# Altium PCB power2pix_pcb.PcbDoc
Units mm, origin at the board's own origin, x right, y up, seen from the top; angles counter-clockwise.
Board outline 100 x 70 mm, 2 copper layers (Top Layer, Bottom Layer); 70 components, 36 nets, 230 pads, 24 vias.
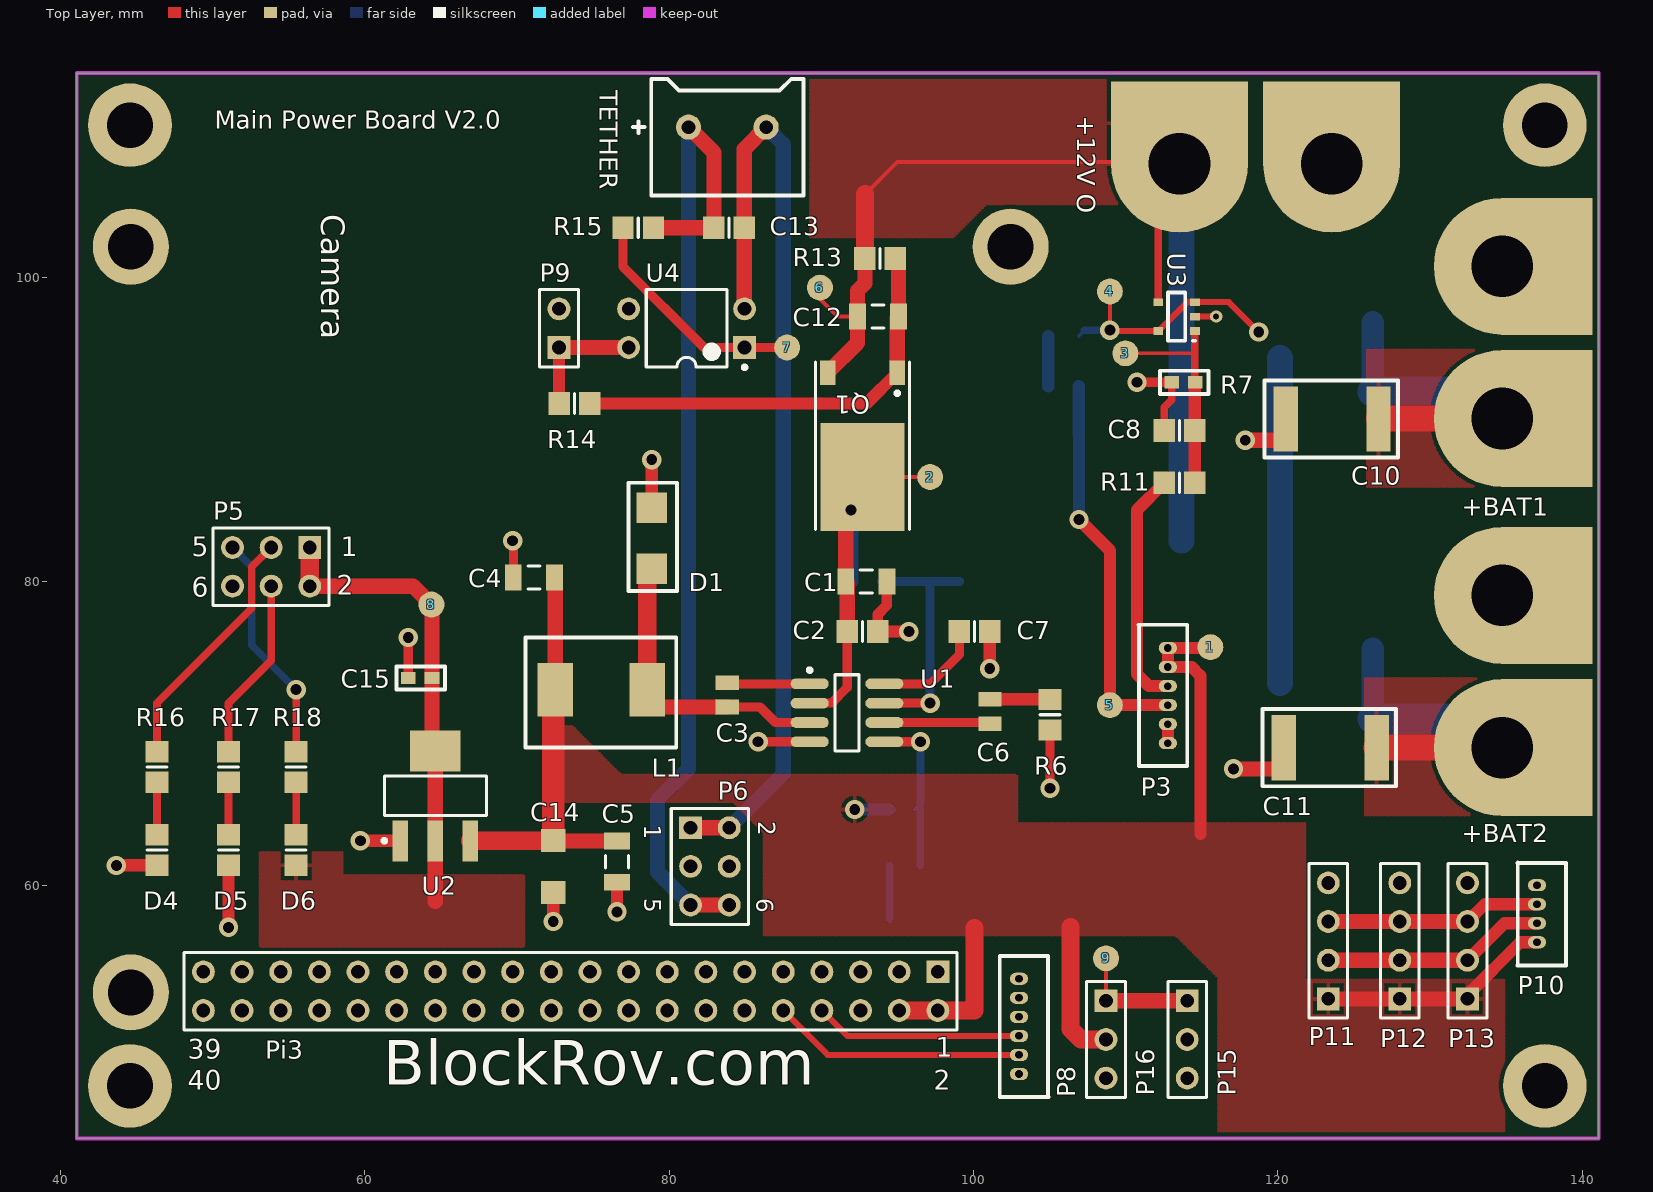
[diagram p0: Top Layer view]
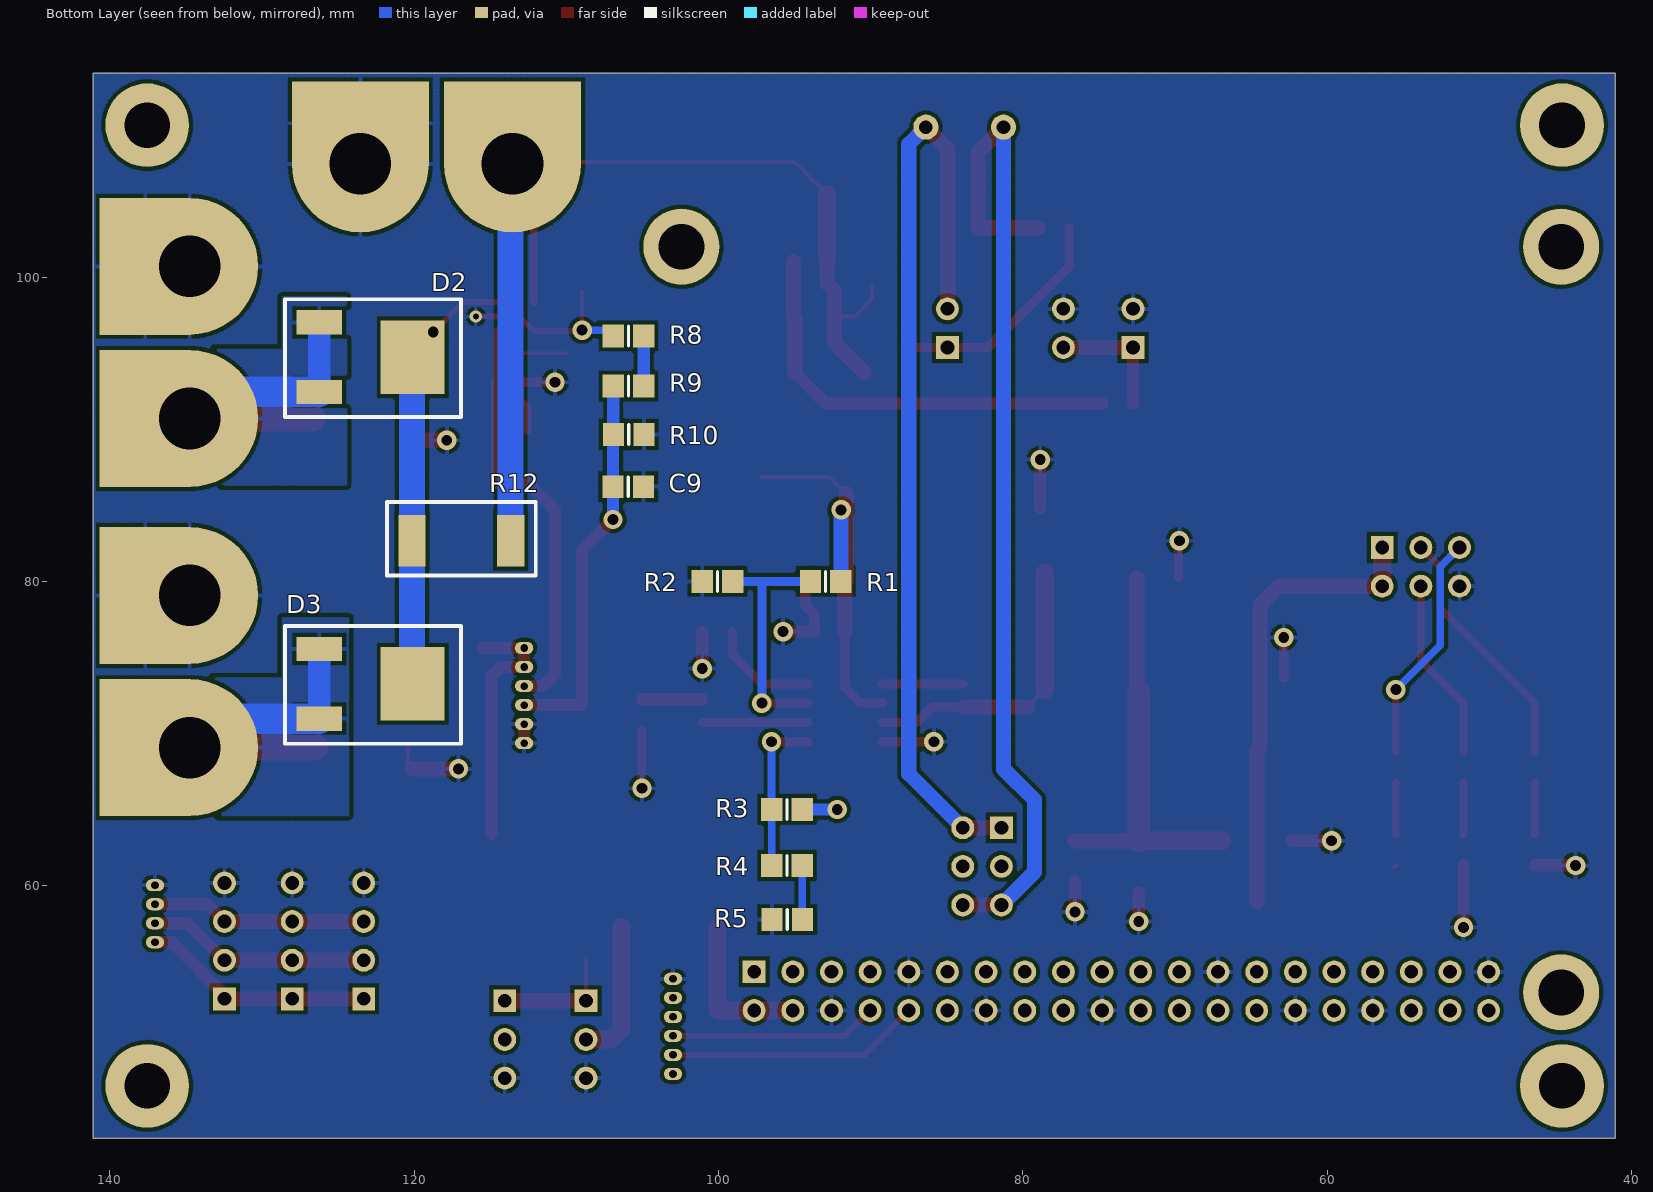
[diagram p1: Bottom Layer view, seen from below]

## Layer stack, top to bottom
Top Solder: solder mask 0.0102, Solder Resist, Dk 3.5
Top Layer: signal copper 0.0356
Dielectric 1: dielectric 0.32, FR-4, Dk 4.8
Bottom Layer: signal copper 0.0356
Bottom Solder: solder mask 0.0102, Solder Resist, Dk 3.5

## Board outline
41.087,43.411 41.087,113.411 141.087,113.411 141.087,43.424 141.074,43.411

## Design rules (kind name [scope] priority, off if disabled: settings)
Clearance [All] p1: gap=0.254
PolygonConnect [All] p1: connectstyle=Relief reliefconductorwidth=0.254 reliefentries=4 polygonreliefangle="90 Angle" airgapwidth=0.254
RoutingVias [All] p1: holewidth=0.711 width=1.27 viastyle="Through Hole" minholewidth=0.711 minwidth=1.27 maxholewidth=0.711 maxwidth=1.27
SolderMaskExpansion [All] p1: expansion=0.102
Width [All] p1: maxlimit=4 minlimit=0.254 preferedwidth=0.254
30 further rules are at their usual default settings.

## Classes and differential pairs
component class power2pix: 1 2 3 4 5 6 7 8 C1 C2 C3 C4 C5 C6 C7 C8 C9 C10 C11 C12 C13 C14 C15 D1 D2 D3 L1 Q1 R1 R2 R3 R4 R5 R6 R7 R8 R9 R10 R11 R12 R13 R14 R15 U1 U2 U3 U4
component class power2pix_connector: 9 "+12V O" +BAT1 +BAT2 D4 D5 D6 P3 P5 P6 P8 P9 P10 P11 P12 P13 P15 P16 Pi3 R16 R17 R18 TETHER

## Components (designator, comment, footprint, x,y, rotation, side; value= is the part's Value field where it differs from the comment)
1 "tp" testpoint 115.57,75.692 r0 top (schematic designator tp1)
2 "tp" testpoint 97.155,86.868 r90 top (schematic designator tp2)
3 "tp" testpoint 109.982,94.996 r90 top (schematic designator tp3)
4 "tp" testpoint 108.966,99.06 r90 top (schematic designator tp4)
5 "tp" testpoint 108.966,71.882 r0 top (schematic designator tp5)
6 "tp" testpoint 89.916,99.314 r0 top (schematic designator tp6)
7 "tp" testpoint 87.757,95.377 r0 top (schematic designator tp7)
8 "tp" testpoint 64.389,78.486 r180 top (schematic designator tp8)
9 "tp" testpoint 108.712,55.245 r0 top (schematic designator tp9)
"+12V O" "Header 2" M4_POWER 113.538,107.442 r0 top locked (schematic designator P14)
+BAT1 "Header 2" M4_POWER 134.747,90.711 r90 top locked (schematic designator P1)
+BAT2 "Header 2" M4_POWER 134.747,69.088 r90 top locked (schematic designator P2)
C1 "Cap" C1206 92.964,80.01 r180 top
C2 "Cap" 6-0805_M 92.71,76.708 r180 top
C3 "Cap" 0603 83.82,71.755 r90 top
C4 "Cap" C1206 71.12,80.264 r0 top
C5 "Cap" C1206 76.581,61.595 r90 top
C6 "Cap" 0603 101.092,72.263 r270 top
C7 "Cap" 6-0805_M 100.076,76.708 r180 top
C8 "Cap" 6-0805_M 113.538,89.916 r0 top
C9 "Cap" 6-0805_M 105.934,86.233 r0 bottom
C10 "Cap Pol2" 7343 126.619,90.678 r180 top
C11 "Cap Pol2" 7343 126.492,69.088 r180 top
C12 "Cap" C1206 93.726,97.409 r0 top
C13 "Cap" 6-0805_M 83.947,103.251 r0 top
C14 "Cap" 1206 72.36,59.522 r90 top
C15 "Cap" my0603 62.865,73.66 r0 top
D1 "1n5824" 1N5824 78.867,84.836 r270 top
D2 "MBRD835L" MBRD835L 120.103,94.742 r0 bottom
D3 "MBRD835L" MBRD835L 120.103,73.279 r0 bottom
D4 "LED0" 6-0805_M 46.355,62.357 r270 top
D5 "LED0" 6-0805_M 51.054,62.357 r270 top
D6 "LED0" 6-0805_M 55.499,62.357 r90 top
L1 "Inductor" 0630 78.567,72.898 r180 top
P3 "Header 6" 1.25_6PIN 112.776,75.632 r270 top
P5 "Header 3X2" HDR2X3 56.397,82.236 r180 top locked
P6 "Header 3X2" HDR2X3 81.416,63.823 r270 top locked
P8 "Header 6" 1.25_6PIN 102.997,47.645 r90 top
P9 "Header 2" HDR1X2 72.771,95.377 r90 top
P10 "Header 4" 1_25_4PIN 137.033,56.301 r90 top
P11 "Header 4" HDR1X4 123.317,52.578 r90 top
P12 "Header 4" HDR1X4 128.016,52.578 r90 top
P13 "Header 4" HDR1X4 132.461,52.578 r90 top
P15 "Header 3" HDR1X3 114.046,52.451 r270 top
P16 "Header 3" HDR1X3 108.712,52.451 r270 top
Pi3 "Header 20X2" HDR2X20 97.663,54.356 r180 top locked (schematic designator P4)
Q1 "IRFR5305" TO-252AA 92.71,90.293 r180 top
R1 "Res2" 6-0805_M 92.964,80.01 r180 bottom
R2 "Res2" 6-0805_M 100.076,80.01 r180 bottom
R3 "Res2" 6-0805_M 95.504,65.024 r0 bottom
R4 "Res2" 6-0805_M 95.504,61.341 r0 bottom
R5 "Res2" 6-0805_M 95.488,57.785 r180 bottom
R6 "Res2" 6-0805_M 105.029,71.247 r90 top
R7 "Res2" my0603 113.03,93.091 r0 top
R8 "Res2" 6-0805_M 105.918,96.139 r0 bottom
R9 "Res2" 6-0805_M 105.918,92.837 r180 bottom
R10 "Res2" 6-0805_M 105.902,89.662 r0 bottom
R11 "Res2" 6-0805_M 113.538,86.487 r180 top
R12 "Res2" 2512 120.145,82.677 r180 bottom
R13 "Res2" 6-0805_M 93.869,101.219 r0 top
R14 "Res2" 6-0805_M 73.787,91.694 r180 top
R15 "Res2" 6-0805_M 77.978,103.251 r0 top
R16 "Res2" 6-0805_M 46.355,67.818 r90 top
R17 "Res2" 6-0805_M 51.054,67.818 r90 top
R18 "Res2" 6-0805_M 55.499,67.818 r270 top
TETHER "Header 2" ConnectorBlue 86.38,109.855 r180 top (schematic designator P7)
U1 "MP1593DN" SO8_M 91.694,71.374 r0 top
U2 "AMS1117-3.3" SOT223_M 64.643,65.913 r90 top
U3 "INA169" SOT23-5 114.554,98.359 r270 top
U4 "PC817" DIP-4 81.153,96.647 r180 top

## Footprints (in the part's own frame and the unit in brackets; to place one, negate y for a bottom-side part, rotate by r counter-clockwise, add the part's x,y. Pads: shape width x height; smd on the part's side, far side on the other; paste and mask are expansions set on the pad)
1.25_6PIN [mm]
  oval 0.8x1.2 hole 0.5: 1(0,0) 2(1.25,0) 3(2.5,0) 4(3.75,0) 5(5,0) 6(6.25,0)
  silkscreen extent -1.52,-1.93 7.75,1.27
1_25_4PIN [mm]
  oval 0.8x1.2 hole 0.5: 1(0,0) 2(1.25,0) 3(2.5,0) 4(3.75,0)
  silkscreen extent -1.52,-1.91 5.23,1.3
1N5824 [mm]
  rect 2x2 smd: 1(0,0) 2(4,0)
  silkscreen extent -1.65,-1.52 5.46,1.65
6-0805_M [mm] "Chip Resistor, Body 2.0x1.2mm, IPC Low Density"
  rect 1.4x1.5 smd: 1(-1,0) 2(1,0)
  silkscreen extent 0,-0.65 0,0.65, body extent -1.07,-0.7 1.07,0.7, height 0.7
0603 [mm]
  rect 0.965x1.524 smd: 1(0,0) 2(1.6,0)
0630 [mm]
  rect 2.35x3.5 smd: 1(0,0) 2(6.05,0)
  silkscreen extent -1.91,-3.43 8,3.81
1206 [mm]
  rect 1.52x1.6 smd: 1(0.05,-0.03) 2(3.47,-0.03)
2512 [mm]
  rect 1.8x3.4 smd: 1(0,0) 2(6.48,0)
  silkscreen extent -1.65,-2.29 8.13,2.54
7343 [mm]
  rect 1.6x4.3 smd: 1(0,0) 2(6.096,0)
  silkscreen extent -1.27,-2.54 7.49,2.54
C1206 [mm] "Chip Capacitor, Body 3.2x1.6mm, IPC High Density"
  rect 1.1x1.7 smd: 1(-1.35,0) 2(1.35,0)
  silkscreen extent -0.4,-0.75 0.4,0.75, body extent -1.7,-0.9 1.7,0.9, height 1.3
ConnectorBlue [mm]
  round 1.65 hole 0.9: 1(0,0) 2(5.1,0)
  silkscreen extent -2.45,-3.18 8.76,4.48
DIP-4 [mm] "DIP; 4 Leads; Row Spacing 7.62 mm; Pitch 2.54 mm"
  rect 1.5x1.5 hole 0.9: 1(-3.81,1.27)
  round 1.5 hole 0.9: 2(-3.81,-1.27) 3(3.81,-1.27) 4(3.81,1.27)
  silkscreen extent -3.94,-2.55 2.65,2.69, body extent -3.15,-2.5 3.15,2.5, height 5.6
HDR1X2 [mm] "Connector; Header; 2 Position"
  rect 1.5x1.5 hole 0.9: 1(0,0)
  round 1.5 hole 0.9: 2(2.54,0)
  silkscreen extent -1.27,-1.27 3.81,1.27
HDR1X3 [mm] "Connector; Header; 3 Position"
  rect 1.5x1.5 hole 0.9: 1(0,0)
  round 1.5 hole 0.9: 2(2.54,0) 3(5.08,0)
  silkscreen extent -1.27,-1.27 6.35,1.27
HDR1X4 [mm] "Connector; Header; 4 Position"
  rect 1.5x1.5 hole 0.9: 1(0,0)
  round 1.5 hole 0.9: 2(2.54,0) 3(5.08,0) 4(7.62,0)
  silkscreen extent -1.27,-1.27 8.89,1.27
HDR2X3 [mm] "Connector; Header; 3x2 Position"
  rect 1.5x1.5 hole 0.9: 1(0,0)
  round 1.5 hole 0.9: 2(0,2.54) 3(2.54,0) 4(2.54,2.54) 5(5.08,0) 6(5.08,2.54)
  silkscreen extent -1.27,-1.27 6.35,3.81
HDR2X20 [mm] "Connector; Header; 20x2 Position"
  rect 1.5x1.5 hole 0.9: 1(0,0)
  round 1.5 hole 0.9: 2(0,2.54) 3(2.54,0) 4(2.54,2.54) 5(5.08,0) 6(5.08,2.54) 7(7.62,0) 8(7.62,2.54) 9(10.16,0) 10(10.16,2.54) 11(12.7,0) 12(12.7,2.54) 13(15.24,0) 14(15.24,2.54) 15(17.78,0) 16(17.78,2.54) 17(20.32,0) 18(20.32,2.54) 19(22.86,0) 20(22.86,2.54) 21(25.4,0) 22(25.4,2.54) 23(27.94,0) 24(27.94,2.54) 25(30.48,0) 26(30.48,2.54) 27(33.02,0) 28(33.02,2.54) 29(35.56,0) 30(35.56,2.54) 31(38.1,0) 32(38.1,2.54) 33(40.64,0) 34(40.64,2.54) 35(43.18,0) 36(43.18,2.54) 37(45.72,0) 38(45.72,2.54) 39(48.26,0) 40(48.26,2.54)
  silkscreen extent -1.27,-1.27 49.53,3.81
M4_POWER [mm]
  round 9 hole 4.05: 1(0,0) 2(10,0)
MBRD835L [mm]
  rect 3x1.6 smd: 1(6.135,2.286) 3(6.135,-2.286)
  rect 4.191x4.826 smd: 2(0,0)
  silkscreen extent -3.17,-3.81 8.38,3.94
my0603 [mm]
  rect 0.965x0.8 smd: 1(0,0) 2(1.555,0)
  silkscreen extent -0.76,-0.76 2.41,0.76
SO8_M [mm] "SOIC, 8-Leads, Body 4.9x3.9mm, Pitch 1.27mm, IPC Low Density"
  oval 2.5x0.7 smd: 1(-2.45,1.905) 2(-2.45,0.635) 3(-2.45,-0.635) 4(-2.45,-1.905) 5(2.45,-1.905) 6(2.45,-0.635) 7(2.45,0.635) 8(2.45,1.905)
  silkscreen extent -2.57,-2.5 0.8,2.93, body extent -2,-2.5 2,2.5, height 1.75
SOT23-5 [mm]
  rect 0.5x0.65 smd: 1(1.9,0) 2(0.95,0) 3(0,0) 4(0,-2.413) 5(1.9,-2.413)
  silkscreen extent -0.63,-1.78 2.54,0
SOT223_M [mm] "SOT223, 4-Leads, Body 6.5x3.5mm, Pitch 2.3mm, Lead Span 7mm, IPC Low Density"
  rect 2.7x1 smd: 1(-2.95,2.3) 2(-2.95,0) 3(-2.95,-2.3)
  rect 2.7x3.3 smd: 4(2.95,0)
  silkscreen extent -3.07,-3.35 1.3,3.47, body extent -1.85,-3.35 1.85,3.35, height 1.7
testpoint [mm]
  round 1.7 smd: 1(0,0)
TO-252AA [mm] "D-PAK/TO-252-AA; 3 Leads (1 Cropped); Body 10.4 (inc. leads) x 6.7 mm (LxW max)"
  rect 1x1.6 smd: 1(-2.285,-3.425) 3(2.285,-3.425)
  rect 5.5x7.1 smd: 4(0,3.425)
  silkscreen extent -3.09,-4.13 3.09,6.88

## Part data
"+12V O" +BAT1 +BAT2 P9 TETHER: "Header, 2-Pin"
C1 C2 C3 C4 C5 C6 C7 C8 C9 C12 C13 C14 C15: "Capacitor"
C10 C11: "Polarized Capacitor (Axial)"
D1: library part Diode, "Default Diode"
D2 D3: library part "Diode 11DQ03", "Schottky Rectifier"
D4 D5 D6: "Typical INFRARED GaAs LED"
P3 P8: "Header, 6-Pin"
P5 P6: "Header, 3-Pin, Dual row"
P10 P11 P12 P13: "Header, 4-Pin"
P15 P16: "Header, 3-Pin"
Pi3: "Header, 20-Pin, Dual row"
Q1: library part PMOS-2, "P-Channel Power MOSFET"
R1 R2 R3 R4 R5 R6 R7 R8 R9 R10 R11 R12 R13 R14 R15 R16 R17 R18: "Resistor"
U4: library part Optoisolator1, "4-Pin Phototransistor Optocoupler"

## Free pads (board coordinates)
  round 5.5 hole 3: 0(44.577,109.982) 1(44.577,46.863) 2(137.541,109.982) 3(137.541,46.863)
  round 5 hole 3: 4(44.638,102) 5(44.638,53) 6(102.438,102)
  rect 6x9 smd: 7(137.668,100.711) 8(137.668,90.711) 9(137.668,79.088) 10(137.668,69.088)
  rect 9x5.5 smd: 11(123.538,110.109) 12(113.538,110.109)
  rect 6x9 smd far side: 13(137.668,100.711) 14(137.668,90.711) 15(137.668,79.088) 16(137.668,69.088)
  rect 9x5.5 smd far side: 17(123.539,110.109) 18(113.538,110.109)

## Via types
v1: diameter 1.27, hole 0.711, Top Layer to Bottom Layer, 23 vias
v2: diameter 0.8, hole 0.4, Top Layer to Bottom Layer, 1 vias

## Nets (pads, with @x,y where several pads share a name; then routed paths per layer and width w, separated by ;. In a path a pad name is that pad's centre, name@x,y a point inside that pad or via, vN(x,y) a via of type N, cw(c..) or ccw(c..) an arc to the next point about the centre after c; other vN are vias at no path point)
GND: "+12V O.2" +BAT1.2 +BAT2.2 C1.1 C2.1 C4.1 C5.1 C7.1 C8.1 C9.1 C10.2 C11.2 C14.1 C15.1 D1.1 D4.2 D5.2 P3.5 P3.6 P5.6 P8.6 P9.2 P10.4 P11.4 P12.4 P13.4 P15.3 P16.3 pad.7 pad.9 pad.11 pad.13 pad.15 pad.17 Pi3.6 Pi3.9 Pi3.14 Pi3.20 Pi3.25 Pi3.30 Pi3.34 Pi3.39 R2.1 R5.1 R6.1 R7.1 R10.1 U1.4 U2.1 U3.2 U4.3 | length 54.1
  Top Layer w0.254: v1(43.688,61.341) v1@43.704,61.357 ; v1(69.723,82.677) v1@69.77,82.63 ; v1@100.584,74.168 100.695,74.279 v1(101.076,74.279) ; C10.2@120.015,89.281 120.523,89.789 C10.2 ; C11.2@120.142,67.691 120.396,67.945 C11.2 ; P10.4@136.886,60.198 P10.4
  Top Layer w0.4: U3.2 v2(115.951,97.409)
  Top Layer w0.5: C8.1 112.538,91.456 113.03,91.948 R7.1
  Top Layer w0.6: C15.1 v1(62.865,76.327) ; C4.1 v1@69.77,82.63 ; v1(85.852,69.469) U1.4 ; v1(105.029,66.421) R6.1 ; v1(110.744,93.091) R7.1
  Top Layer w0.7: C2.1 93.71,77.835 94.314,78.439 C1.1
  Top Layer w0.8: v1@43.704,61.357 D4.2 ; v1(51.054,57.277) D5.2 ; v1(59.719,62.963) U2.1 ; v1(72.39,57.658) C14.1 ; v1(76.581,58.293) C5.1 ; D1.1 v1(78.867,88.011) ; C2.1 v1(95.758,76.708) ; v1(101.076,74.279) C7.1 ; P3.6 P3.5
  Top Layer w1: v1(117.094,67.691) C11.2@120.142,67.691 ; v1(117.856,89.281) C10.2@120.015,89.281
NetC1_2: 2.1 C1.2 C2.2 Q1.4 R1.2 U1.2 | length 26.4
  Top Layer w0.254: C1.2 C1.2@91.71,79.914 ; Q1.4@91.614,85.772 Q1.4 2.1
  Top Layer w0.6: U1.2 90.678,72.009 91.71,73.041 C2.2
  Top Layer w1: C1.2 Q1.4@91.614,85.772 ; C2.2 C1.2@91.71,79.914
  Bottom Layer w0.254: v1(91.948,84.709) v1@91.964,84.693
  Bottom Layer w1: R1.2 v1@91.964,84.693
NetC3_1: C3.1 D1.2 L1.1 U1.3 | length 19.6
  Top Layer w0.254: L1.1 L1.1@79.71,71.755 ; D1.2@78.567,80.536 D1.2
  Top Layer w0.6: C3.1 85.979,71.755 86.995,70.739 U1.3
  Top Layer w1: L1.1@79.71,71.755 C3.1
  Top Layer w1.2: L1.1 D1.2@78.567,80.536
NetC3_2: C3.2 U1.1 | length 5.5
  Top Layer w0.254: C3.2 C3.2@83.896,73.279
  Top Layer w0.6: C3.2@83.896,73.279 U1.1
NetC4_2: 1.1 C4.2 C5.2 C14.2 L1.2 P3.1 P3.2 P10.1 P11.1 P12.1 P13.1 P16.2 Pi3.2 Pi3.4 R3.1 U2.3 | length 81.2
  Top Layer w0.254: C14.2@72.361,62.963 C14.2 C14.2@72.437,62.945 ; L1.2@72.39,72.771 L1.2 ; C4.2 C4.2@72.517,80.217 ; 1.1@115.51,75.632 1.1 ; P13.1 P13.1@132.461,52.832
  Top Layer w0.8: 114.91,63.424 114.91,73.812 114.34,74.382 P3.2 P3.1 1.1@115.51,75.632 ; P13.1@132.461,52.832 135.93,56.301 P10.1
  Top Layer w1: C14.2@72.437,62.945 C5.2 ; L1.2 C4.2@72.517,80.217 ; P11.1 P12.1 P13.1
  Top Layer w1.2: U2.3 C14.2@72.361,62.963 ; Pi3.4 Pi3.2 100.076,51.816 100.076,57.226 ; 106.375,57.277 106.375,50.597 107.061,49.911 P16.2
  Top Layer w1.5: C14.2 L1.2@72.39,72.771
  Bottom Layer w0.8: v1(92.202,65.024) R3.1
NetC6_1: C6.1 R6.2 | length 3.9
  Top Layer w0.254: R6.2@105.013,72.263 R6.2
  Top Layer w0.8: C6.1 R6.2@105.013,72.263
NetC6_2: C6.2 U1.6 | length 7
  Top Layer w0.254: C6.2@101.016,70.739 C6.2
  Top Layer w0.6: U1.6 C6.2@101.016,70.739
NetC7_2: C7.2 U1.8 | length 7.2
  Top Layer w0.6: U1.8 97.155,73.279 99.076,75.2 C7.2
NetC8_2: 3.1 C8.2 R7.2 R11.1 U3.1 | length 14.6
  Top Layer w0.254: 3.1 114.554,94.996 ; R7.2@114.538,93.106 R7.2@114.554,93.122
  Top Layer w0.5: R7.2@114.554,93.122 114.554,94.996 U3.1
  Top Layer w0.8: R11.1 C8.2 R7.2@114.538,93.106
NetC9_2: 5.1 C9.2 P3.4 R9.1 R10.2 | length 25.6
  Top Layer w0.8: v1(106.934,84.074) 108.966,82.042 5.1 P3.4
  Bottom Layer w0.254: R10.2@106.918,89.678 R10.2 R10.2@106.934,89.63
  Bottom Layer w0.8: R10.2@106.918,89.678 R9.1 ; v1(106.934,84.074) C9.2 R10.2@106.934,89.63
NetC10_1: +BAT1.1 C10.1 D2.1 D2.3 pad.8 pad.14 | length 24.9
  Top Layer w0.254: C10.1 C10.1@126.652,90.711 ; +BAT1.1 pad.8
  Top Layer w1.7: C10.1@126.652,90.711 +BAT1.1
  Bottom Layer w0.254: +BAT1.1@133.002,92.456 +BAT1.1
  Bottom Layer w1.5: D2.1 D2.3
  Bottom Layer w2: D2.1 +BAT1.1@133.002,92.456
NetC11_1: +BAT2.1 C11.1 D3.1 D3.3 pad.10 pad.16 | length 25
  Top Layer w0.254: +BAT2.1 pad.10
  Top Layer w1.7: C11.1 +BAT2.1
  Bottom Layer w0.254: +BAT2.1@132.842,70.993 +BAT2.1
  Bottom Layer w1.5: D3.1 D3.3
  Bottom Layer w2: D3.1 +BAT2.1@132.842,70.993
NetC12_1: 6.1 "+12V O.1" C12.1 pad.12 pad.18 Q1.3 R12.2 R13.1 U3.4 | length 74.2
  Top Layer w0.254: 6.1 89.916,98.552 91.059,97.409 C12.1 ; 92.869,105.442 94.996,107.569 110.998,107.569 112.141,108.712 pad.12
  Top Layer w0.5: U3.4 pad.12@112.141,108.712
  Top Layer w1: Q1.3 92.376,95.669 C12.1 92.376,99.107 92.869,99.6 R13.1
  Top Layer w1.2: R13.1 92.869,105.442
  Bottom Layer w0.254: pad.18@113.538,107.442 113.665,107.315
  Bottom Layer w1.7: R12.2 113.665,107.315
NetC12_2: C12.2 Q1.1 R13.2 R14.1 | length 28.7
  Top Layer w0.254: R13.2 R13.2@95.076,101.012 ; C12.2@94.995,97.328 C12.2
  Top Layer w0.8: R14.1 92.971,91.694 Q1.1
  Top Layer w1: Q1.1 C12.2@94.995,97.328 ; C12.2 R13.2@95.076,101.012
NetC15_2: 8.1 C15.2 D6.1 P5.1 P5.2 U2.2 U2.4 | length 30.8
  Top Layer w0.254: D6.1 D6.1@55.624,61.232 ; 8.1 8.1@64.42,78.455 ; U2.4@64.42,69.086 U2.4
  Top Layer w1: P5.2 63.179,79.696 8.1 ; U2.4@64.42,69.086 C15.2 8.1@64.42,78.455 ; 64.643,58.979 U2.2 U2.4
  Top Layer w1.2: P5.2 P5.1
NetD2_2: 4.1 D2.2 D3.2 R8.2 R12.1 U3.3 U3.5 | length 37.6
  Top Layer w0.254: 4.1 v1(108.966,96.52) v1@109.027,96.459
  Top Layer w0.4: v1@109.027,96.459 U3.5 114.041,98.359 U3.3 116.779,98.359 v1(118.745,96.393)
  Bottom Layer w0.254: R8.2 R8.2@107.299,96.52 ; D3.2 D3.2@120.145,73.321 ; D2.2 D2.2@120.145,94.7
  Bottom Layer w0.5: R8.2@107.299,96.52 v1(108.966,96.52)
  Bottom Layer w1.7: D3.2@120.145,73.321 R12.1 D2.2@120.145,94.7
NetD4_1: D4.1 R16.1 | length 3.5
  Top Layer w0.5: D4.1 R16.1
NetD5_1: D5.1 R17.1 | length 3.5
  Top Layer w0.5: D5.1 R17.1
NetD6_2: D6.2 R18.2 | length 3.5
  Top Layer w0.5: D6.2 R18.2
NetP3_3: P3.3 R11.2 | length 15.7
  Top Layer w0.8: R11.2 110.744,84.693 110.744,73.914 111.526,73.132 P3.3
NetP4_8: P8.3 Pi3.8 | length 13.6
  Top Layer w0.4: Pi3.8 91.714,50.145 P8.3
NetP4_10: P8.2 Pi3.10 | length 16.7
  Top Layer w0.4: Pi3.10 90.424,48.895 P8.2
NetP5_5: P5.5 R18.1 | length 15.2
  Top Layer w0.5: R18.1 v1(55.499,72.898)
  Bottom Layer w0.5: P5.5 52.578,80.975 52.578,75.819 v1(55.499,72.898)
NetP9_1: P9.1 R14.2 U4.4 | length 8.3
  Top Layer w0.254: R14.2@72.771,91.71 R14.2
  Top Layer w0.8: R14.2@72.771,91.71 P9.1
  Top Layer w1: P9.1 U4.4
NetP10_2: P10.2 P11.2 P12.2 P13.2 | length 14.7
  Top Layer w0.8: P13.2 134.894,57.551 P10.2
  Top Layer w1: P11.2 P12.2 P13.2
NetP10_3: P10.3 P11.3 P12.3 P13.3 | length 14.2
  Top Layer w0.8: P13.3 133.604,58.801 P10.3
  Top Layer w1: P11.3 P12.3 P13.3
NetP15_1: 9.1 P15.1 P16.1 | length 8.1
  Top Layer w0.254: P16.1 9.1
  Top Layer w1: P16.1 P15.1
NetR1_1: R1.1 R2.2 U1.7 | length 16.1
  Top Layer w0.6: U1.7 v1(97.155,72.009)
  Bottom Layer w0.6: R1.1 97.155,80.01 ; v1(97.155,72.009) 97.155,80.01 ; R2.2 97.155,80.01
NetR3_2: R3.2 R4.2 U1.5 | length 10.7
  Top Layer w0.254: U1.5@94.123,69.448 U1.5
  Top Layer w0.6: U1.5 v1(96.52,69.469)
  Bottom Layer w0.254: R3.2@96.123,65.024 R3.2@96.52,65.421
  Bottom Layer w0.5: R4.2 R3.2 ; R3.2@96.52,65.421 v1(96.52,69.469)
NetR4_1: R4.1 R5.2 | length 3.6
  Bottom Layer w0.254: R5.2 R5.2@94.504,57.801
  Bottom Layer w0.5: R5.2@94.504,57.801 R4.1
NetR8_1: R8.1 R9.2 | length 3.3
  Bottom Layer w0.8: R9.2 R8.1
NetR15_1: 7.1 R15.1 U4.1 | length 15.5
  Top Layer w0.6: R15.1 76.978,100.695 82.296,95.377 U4.1 7.1
PLC: P5.3 R16.2 | length 16.5
  Top Layer w0.5: R16.2 46.355,72.009 52.578,78.232 52.578,80.957 P5.3
T_A: C13.2 P6.1 P6.2 TETHER.1 U4.2 | length 63
  Top Layer w0.254: U4.2@84.947,97.933 U4.2
  Top Layer w1: P6.1 P6.2 ; U4.2@84.947,97.933 C13.2 84.947,108.422 TETHER.1
  Bottom Layer w1: P6.2 87.503,67.37 87.503,108.732 TETHER.1
T_B: C13.1 P6.5 P6.6 R15.2 TETHER.2 | length 66.7
  Top Layer w1: R15.2 C13.1 82.947,108.188 TETHER.2 ; P6.5 P6.6
  Bottom Layer w1: TETHER.2 81.28,67.691 79.248,65.659 79.248,60.911 P6.5
TP: P5.4 R17.2 | length 12
  Top Layer w0.5: R17.2 51.054,72.009 53.857,74.812 P5.4
pads on no net: P6.3 P6.4 P8.1 P8.4 P8.5 P15.2 Pi3.1 Pi3.3 Pi3.5 Pi3.7 Pi3.11 Pi3.12 Pi3.13 Pi3.15 Pi3.16 Pi3.17 Pi3.18 Pi3.19 Pi3.21 Pi3.22 Pi3.23 Pi3.24 Pi3.26 Pi3.27 Pi3.28 Pi3.29 Pi3.31 Pi3.32 Pi3.33 Pi3.35 Pi3.36 Pi3.37 Pi3.38 Pi3.40

## Polygon pours and split planes (outlines as drawn)
NetC11_1 on Top Layer "top-netc11-1-1" (hatched 90Degree grid 0 track 0.152, remove dead copper, pour order 10): 134.493,73.66 125.73,73.66 125.73,64.643 134.747,64.643 134.747,73.406 134.493,73.66
NetC10_1 on Top Layer "top-netc10-1-1" (hatched 90Degree grid 0 track 0.152, remove dead copper, pour order 8): 134.62,95.25 125.857,95.25 125.857,86.36 125.857,86.233 134.62,86.233 134.62,95.25
NetC12_1 on Top Layer "top-12v-sum-1" (hatched 90Degree grid 0 track 0.152, remove dead copper, pour order 6): 89.281,113.411 89.281,102.616 98.679,102.616 100.838,104.775 109.855,104.775 109.855,113.411 89.281,113.411
NetC15_2 on Top Layer "top-3.3v-1" (hatched 90Degree grid 0 track 0.152, remove dead copper, pour order 4): 53.086,62.23 58.547,62.23 58.547,60.706 70.485,60.706 70.485,56.007 53.086,56.007 53.086,62.23
NetC4_2 on Top Layer "top-5v-2" (hatched 90Degree grid 0 track 0.152, remove dead copper, pour order 2): 72.771,70.485 73.66,70.485 77.089,67.056 72.771,67.056 72.771,70.485
NetC4_2 on Top Layer "top-5v-1" (hatched 90Degree grid 0 track 0.152, remove dead copper, pour order 0): 73.152,67.31 102.87,67.31 102.87,64.135 121.793,64.135 121.793,53.975 121.666,53.848 134.874,53.848 134.874,43.411 116.078,43.411 116.078,53.975 113.284,56.769 86.233,56.769 86.233,63.5 84.201,65.532 73.152,65.532 73.152,67.31
GND on Bottom Layer "bottom-gnd-1" (hatched 90Degree grid 0 track 0.152, remove dead copper, pour order 16): 41.148,113.411 141.097,113.411 141.097,43.434 41.148,43.434 41.148,113.411
NetC11_1 on Bottom Layer "bottom-netc11-1-1" (hatched 90Degree grid 0 track 0.152, remove dead copper, pour order 14): 134.62,73.66 128.651,73.66 128.651,77.597 124.333,77.597 124.333,64.643 134.62,64.643 134.62,73.66
NetC10_1 on Bottom Layer "bottom-netc10-1-1" (hatched 90Degree grid 0 track 0.152, remove dead copper, pour order 12): 134.62,95.25 128.651,95.25 128.651,98.679 124.46,98.679 124.46,86.36 134.62,86.36 134.62,95.25

## Keep-outs
Top Layer:
  lines w0.254: 141.074,43.411 41.087,43.411 41.087,113.411 141.087,113.411 ; 141.087,43.424 141.087,113.424

## Silkscreen, mask and mechanical layers (free items; w line width, h text height)
Top Overlay:
  text "Main Power Board V2.0" at 50.165,109.347 h2
  text "Camera" at 57.15,104.14 h1.52 r270
  text "BlockRov.com" at 61.214,45.974 h5
Mechanical 1:
  lines w0.254: 59.563,81.407 63.627,81.407 63.627,104.407 59.563,104.407 59.563,81.407

## Text inside footprints (layer, text, board x,y; h text height)
P5: Top Overlay "6" at 48.641,78.994 h1.27; Top Overlay "5" at 48.641,81.661 h1.27; Top Overlay "2" at 58.166,79.121 h1.27; Top Overlay "1" at 58.42,81.661 h1.27
P6: Top Overlay "6" at 85.725,59.182 h1.1 r270; Top Overlay "5" at 78.359,59.182 h1.1 r270; Top Overlay "2" at 85.852,64.262 h1.1 r270; Top Overlay "1" at 78.359,64.008 h1.1 r270
Pi3: Top Overlay "1" at 97.536,48.768 h1.27; Top Overlay "2" at 97.409,46.609 h1.27; Top Overlay "40" at 48.387,46.609 h1.27; Top Overlay "39" at 48.387,48.641 h1.27